# Altium PCB Växelriktare.PcbDoc (part 2 of 2)
Units mm, origin at the board's own origin, x right, y up, seen from the top; angles counter-clockwise.
Board outline 240.5 x 224.5 mm, 2 copper layers (Top Layer, Bottom Layer); 202 components, 114 nets, 617 pads, 31 vias.
Unrouted connection lines stored in the file: 137.
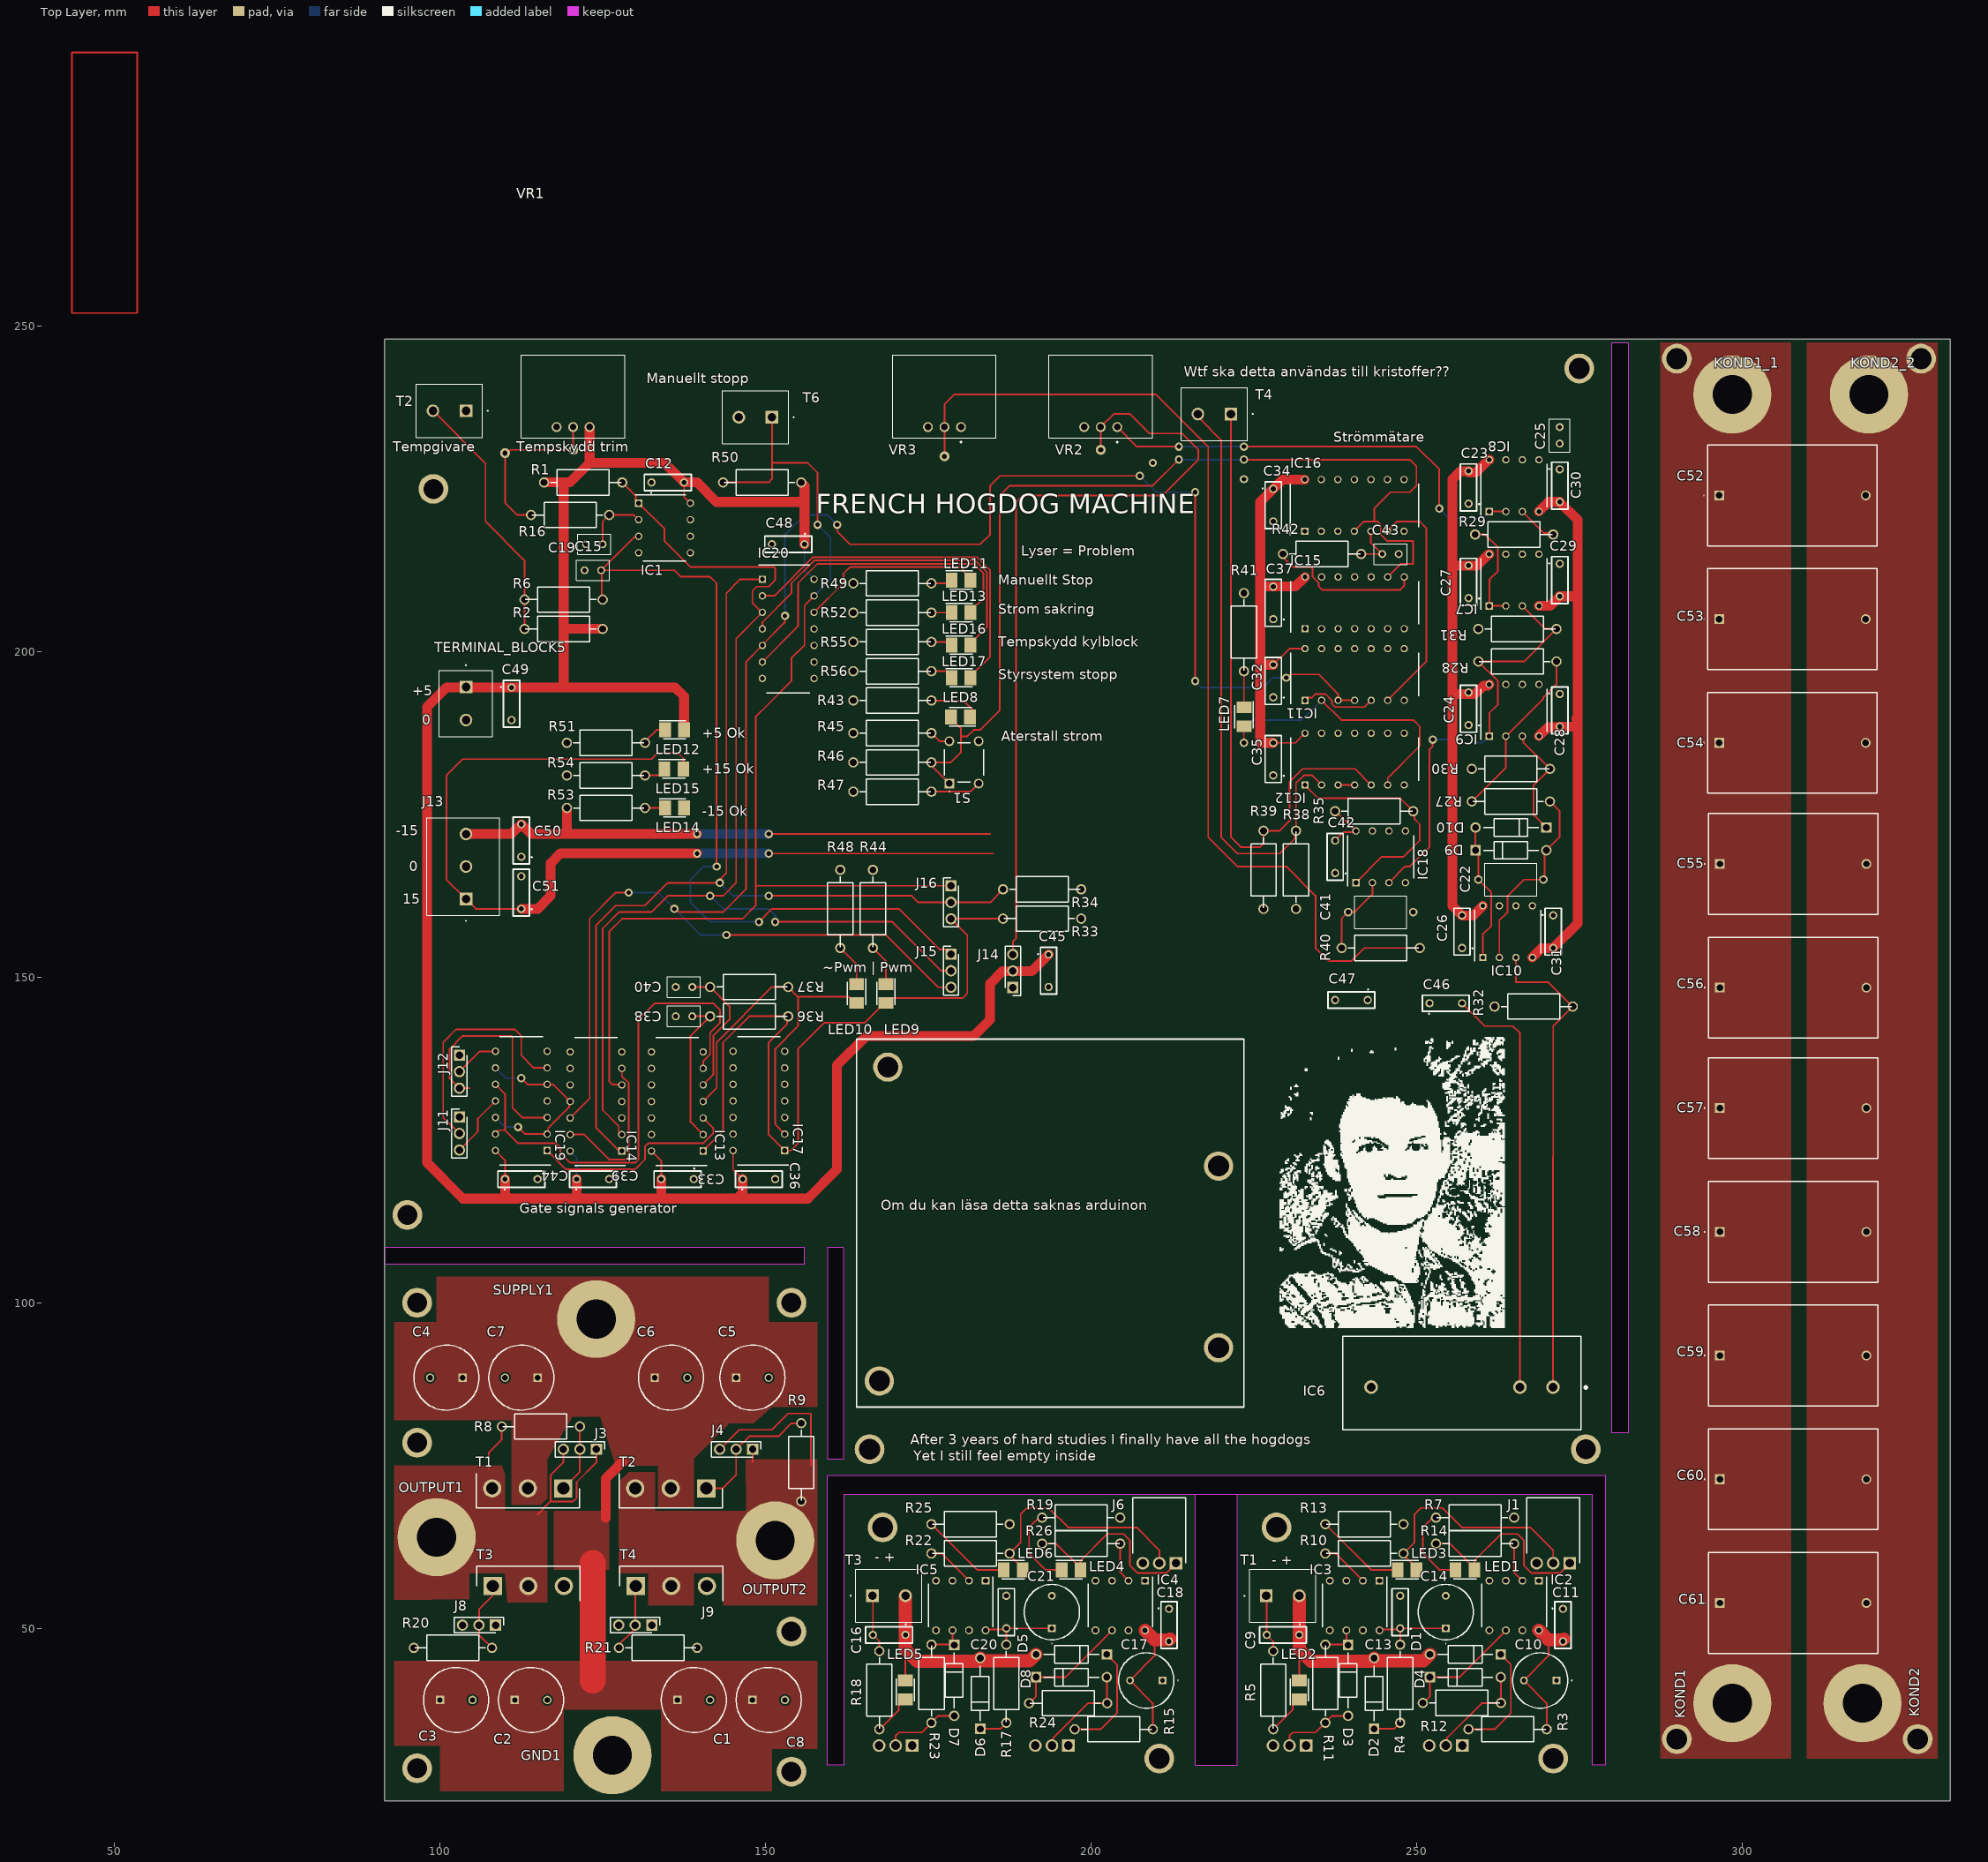
[diagram p0: Top Layer view]

## Via types
v1: diameter 1.27, hole 0.711, Top Layer to Bottom Layer, 31 vias

## Nets (pads, with @x,y where several pads share a name; then routed paths per layer and width w, separated by ;. In a path a pad name is that pad's centre, name@x,y a point inside that pad or via, vN(x,y) a via of type N, cw(c..) or ccw(c..) an arc to the next point about the centre after c; other vN are vias at no path point) (continued)
Vsupply50: (continued)
  Top Layer w0.254: 125,67 125.5,67
  Top Layer w1.5: 125.5,67 125.5,73 128,75.5
  Top Layer w4: 123.5,42 123.5,60
Överströmsskydd: IC11.3 IC11.4 IC14.12 IC20.5 J15.3 | length 297.4
  Top Layer w0.254: IC14.12 123,131.38 123,159 127,163 v1(129,163) ; v1(136,160.5) 136.275,160.5 136.775,160 143.5,160 147,163.5 147,198.43 IC20.5 149.53,201.03 152.984,204.484 152.984,205.484 v1(153,205.5) ; v1(144,156.5) 168.5,156.5 176.54,148.46 J15.3 ; v1(161,219.5) 161.016,219.484 161.016,218.484 163,216.5 183,216.5 184.5,218 184.5,225.5 186,227 v1(207.5,227) ; v1(216,195.5) v1(216,224.5) ; 230.5,196.5 235,196.5 237.96,193.54 IC11.3 IC11.4
  Bottom Layer w0.254: v1(129,163) 133.5,163 v1(136,160.5) 140,156.5 v1(144,156.5) ; v1(153,205.5) 153,218 156,221 159.5,221 v1(161,219.5) ; v1(207.5,227) 210,224.5 v1(216,224.5) ; v1(216,195.5) 217,194.5 226.5,194.5 228,196 v1(230,196)
pads on no net: IC1.7 IC2.1 IC2.4 IC2.7 IC3.1 IC3.4 IC3.7 IC4.1 IC4.4 IC4.7 IC5.1 IC5.4 IC5.7 IC7.7 IC8.7 IC9.7 IC10.7 IC11.10 IC11.13 IC12.8 IC12.11 IC13.8 IC13.11 IC14.8 IC15.2 IC15.4 IC15.6 IC15.10 IC15.12 IC16.3 IC16.8 IC16.11 IC17.4 IC17.8 IC17.10 IC17.12 IC18.7 IC20.7 IC20.8 IC20.10
copper on no net: | length 100
  Top Layer w0.254: 43.5,252 53.5,252 53.5,292 43.5,292 43.5,252

## Polygon pours and split planes (outlines as drawn)
NetC52_1 on Top Layer "NONET_L-01_P-001" (solid, pour order 17): 287.5,247.5 287.5,30 307.5,30 307.5,247.5
NetC52_2 on Top Layer "NONET_L-01_P-001" (solid, pour order 16): 310,247.5 310,30 330,30 330,247.5
HvOutput2 on Top Layer "NONET_L-01_P-001" (solid, pour order 4): 133,74 133,68 147.036,68 147.008,76.035 158,75.965 158,58.5 158,53.5 143.5,53.5 143.5,58.499 139,58.487 139,53.5 132,53.5 132,58.5 127.49,58.5 127.49,72.5 129,74
Vsupply50 on Top Layer "NONET_L-01_P-001" (solid, pour order 8): 93,45 158,45 158,31.5 151,31.5 151,25 134,25 134,37.5 119,37.5 119,25 100,25 100,32 93,32
Vsupply50 on Top Layer "NONET_L-01_P-001" (solid, pour order 7): 133.504,68.5 139,68.5 139,76 144.5,81.5 148.187,81.5 151,84 158,84 158,91.5 158,97 150.5,97 150.5,104 99.5,104 99.5,97 93,97 93,82 111,82 111,70 111,69 115.5,69 116.5,70 116.5,76 120.385,82.5 124.617,82.5 127.004,75 133.494,75
HvOutput1 on Top Layer "NONET_L-01_P-001" (solid, pour order 0): 110,58.5 110.375,54 116.5,54 116.5,55.5 116.5,58 116.5,68 110,68 110,73.667 109.5,75 93,75 93,58.5 93,54.341 104.5,54.5 104.5,58.5
Vsupply50 on Top Layer "NONET_L-01_P-001" (solid, pour order 6): 117.5,59 126,59 126,68 117.5,68
NetC10_1 on Bottom Layer "NONET_L-01_P-001" (solid, pour order 15): 259,54 259,42 250,33 250,30 274,30 274,54
no net on Bottom Layer "NONET_L-01_P-001" (solid, pour order 14): 275,68.5 275,56.5 259.5,56.5 259.5,59.5 243.5,59.5 243.5,56.5 235,56.5 235,68.5
NetC13_2 on Bottom Layer "NONET_L-01_P-001" (solid, pour order 13): 225.5,53 225.5,30 244.5,30 257.5,43 257.5,56.509 246.5,56.5 246.5,53
NetC20_2 on Bottom Layer "NONET_L-01_P-001" (solid, pour order 10): 165,53 165,30 184,30 197,43 197,56.509 186,56.5 186,53
GND on Bottom Layer "NONET_L-01_P-001" (solid, pour order 11): 214.5,68.5 214.5,56.5 199,56.5 199,59.5 183,59.5 183,56.5 174.5,56.5 174.5,68.5
NetC17_1 on Bottom Layer "NONET_L-01_P-001" (solid, pour order 12): 198.5,54 198.5,42 189.5,33 189.5,30 213.5,30 213.5,54
GND_Galv on Bottom Layer "NONET_L-01_P-001" (solid, pour order 9): 93,91 157.978,91 158.001,71 148,71 146.5,69 144.5,66 144.5,57.233 151.989,46.5 158,46.5 158,31.5 151,31.5 151,25 100,25 100,32 93,32 93,57 106,57 106,70.5 93,70.5

## Silkscreen, mask and mechanical layers (free items; w line width, h text height)
Top Overlay:
  drawing of 136 lines, arcs and shapes, not listed
  text "Wtf ska detta användas till kristoffer??" at 214.254,242.254 h1.52
  text "Manuellt stopp" at 131.754,241.262 h1.52
  text "Strömmätare" at 237.254,232.254 h1.52
  text "Tempgivare" at 92.754,230.762 h1.52
  text "Tempskydd trim" at 111.754,230.762 h1.52
  text "FRENCH HOGDOG MACHINE" at 157.754,221.254 h3
  text "Lyser = Problem" at 189.254,214.762 h1.52
  text "Manuellt Stop" at 185.754,210.262 h1.52
  text "Strom sakring" at 185.754,205.762 h1.52
  text "Tempskydd kylblock" at 185.754,200.762 h1.52
  text "Styrsystem stopp" at 185.754,195.762 h1.52
  text "+5" at 95.754,193.254 h1.52
  text "0" at 97.254,188.754 h1.52
  text "+5 Ok" at 140.254,186.754 h1.52
  text "Aterstall strom" at 186.254,186.254 h1.52
  text "+15 Ok" at 140.254,181.254 h1.52
  text "-15 Ok" at 140.254,174.754 h1.52
  text "-15" at 93.254,171.754 h1.52
  text "0" at 95.254,166.254 h1.52
  text "15" at 94.254,161.254 h1.52
  text "~Pwm | Pwm" at 158.754,150.754 h1.52
  text "Om du kan läsa detta saknas arduinon" at 167.754,114.254 h1.52
  text "Gate signals generator" at 112.254,113.762 h1.52
  text "After 3 years of hard studies I finally have all the hogdogs" at 172.254,78.262 h1.52
  text "Yet I still feel empty inside" at 172.754,75.762 h1.52
  text "- +" at 166.754,60.254 h1.52
  text "- +" at 227.754,59.754 h1.52